# Altium PCB PCB1.PcbDoc
Units mm, origin at the board's own origin, x right, y up, seen from the top; angles counter-clockwise.
Board outline 130 x 70 mm, 2 copper layers (Top Layer, Bottom Layer), stack 2.071 mm thick; 22 components, 15 nets, 74 pads, 1 vias.
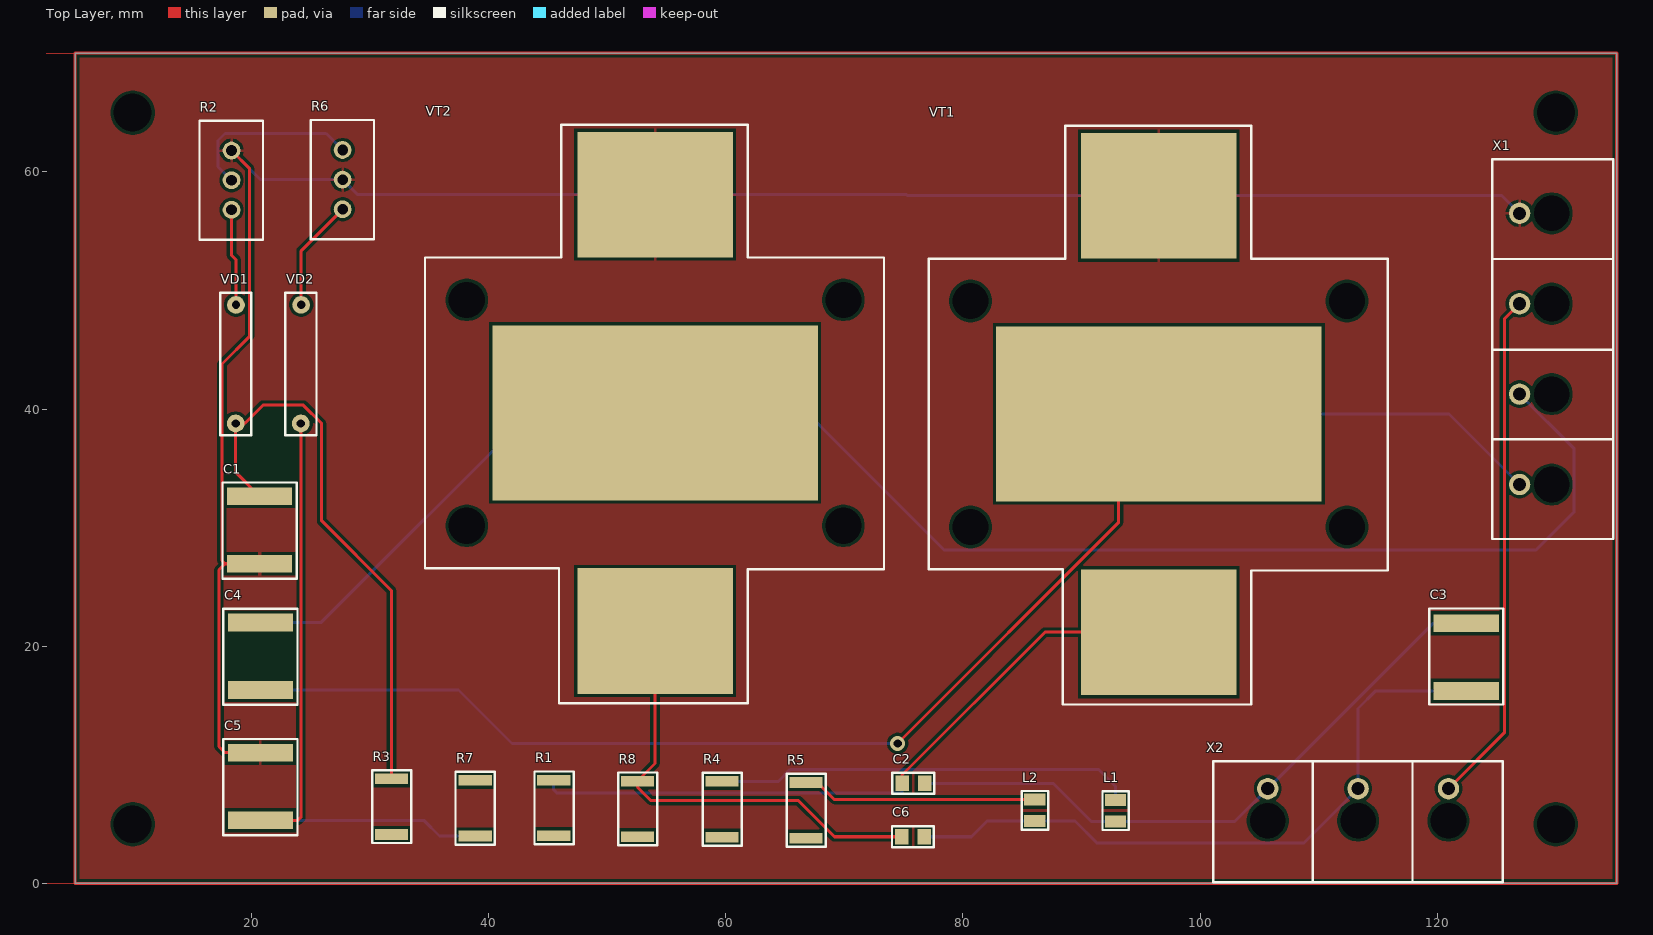
[diagram p0: Top Layer view]
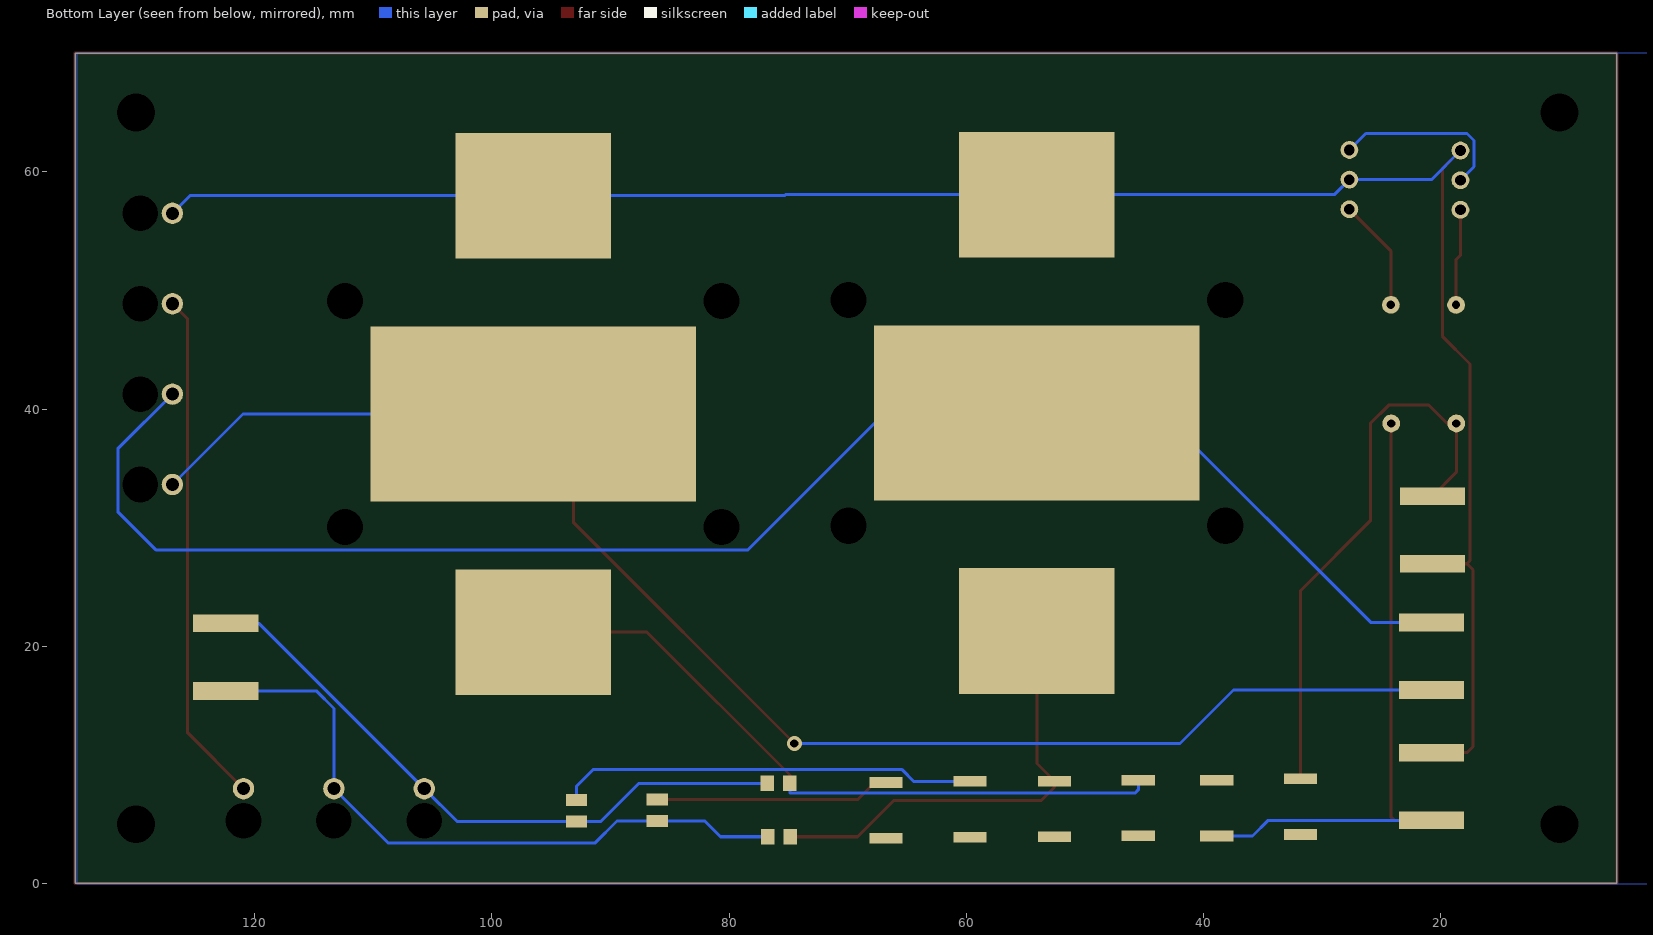
[diagram p1: Bottom Layer view, seen from below]
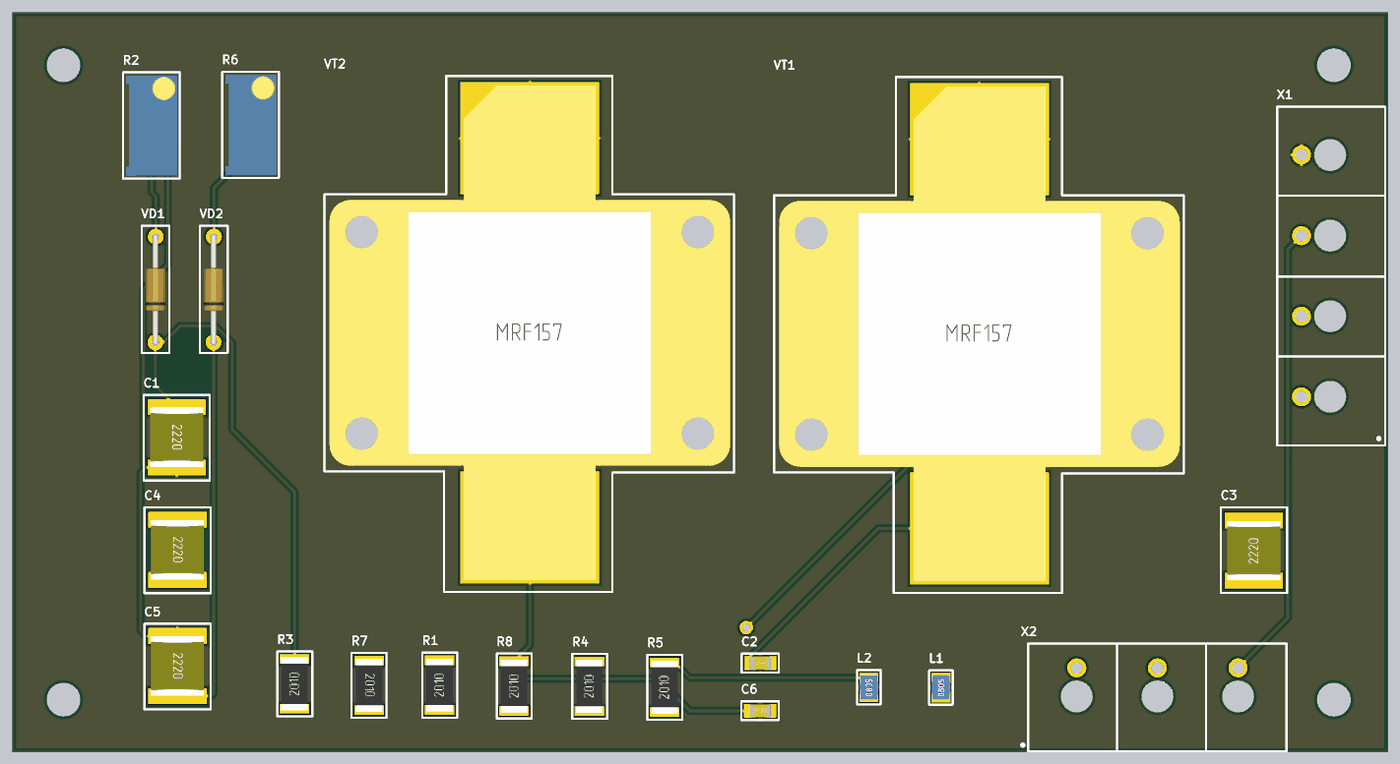
[diagram p2: 3D render of the assembled board from above, using the file's embedded part models]

## Layer stack, top to bottom
Top Solder: solder mask 0.0102, Solder Resist, Dk 3.5
Top Layer: signal copper 0.0356
Dielectric 1: dielectric 2, FR-4, Dk 4.8
Bottom Layer: signal copper 0.0356
Bottom Solder: solder mask 0.0102, Solder Resist, Dk 3.5

## Board outline
5.146,0.021 5.146,70.021 135.146,70.021 135.146,0.021

## Design rules (kind name [scope] priority, off if disabled: settings)
Clearance [All] p1: gap=0.254 ignorepadtopadclearanceinfootprint=FALSE except(0: Arc-Hole Track-Hole SMDPad-Hole THPad-Hole Via-Hole Fill-Hole Poly-Hole Region-Hole Text-Hole)
PolygonConnect [All] p1: connectstyle=Relief reliefconductorwidth=0.254 reliefentries=4 polygonreliefangle="90 Angle" airgapwidth=0.254
RoutingVias [All] p1: holewidth=0.711 width=1.27 viastyle="Through Hole" minholewidth=0.711 minwidth=1.27 maxholewidth=0.711 maxwidth=1.27
SolderMaskExpansion [All] p1: expansion=0.102 istentingtop=FALSE
Width [All] p1: maxlimit=0.254 minlimit=0.254 preferedwidth=0.254
30 further rules are at their usual default settings.

## Components (designator, comment, footprint, x,y, rotation, side; value= is the part's Value field where it differs from the comment)
C1 "0.1 мкФ-10%-2220" CAP_2220 20.698,29.815 r270 top
C2 "2.2пФ±0.25пФ-0805" CAP_0805 75.826,8.451 r180 top
C3 "820 пФ-5%2220" CAP_2220 122.446,19.097 r90 top
C4 "0.01 мкФ-10%-2220" CAP_2220 20.767,19.173 r270 top
C5 "0.1 мкФ-10%-2220" CAP_2220 20.767,8.183 r270 top
C6 "2.2пФ±0.25пФ 0805" CAP_0805 75.804,3.946 r180 top
L1 "15 нГн-5%-0805" INDUCTOR_0805 92.871,6.143 r90 top
L2 "15 мкГн-5%-0805" INDUCTOR_0805 86.067,6.176 r90 top
R1 "12 кОм-5%-2010" Resistor_2010 45.508,6.373 r90 top
R2 "1 кОм-10%-3296" TRIMPOT 18.333,59.308 r90 top
R3 "100 Ом-5%-2010" Resistor_2010 31.824,6.489 r90 top
R4 "24 Ом-5%-2010" Resistor_2010 59.682,6.263 r90 top
R5 "24 Ом-5%-2010" Resistor_2010 66.77,6.177 r90 top
R6 "1 кОм-10%-3296" TRIMPOT 27.7,59.356 r90 top
R7 "100 Ом-5% 2010" Resistor_2010 38.891,6.355 r270 top
R8 "12 кОм-5%-2010" Resistor_2010 52.56,6.289 r90 top
VD1 "1N4148" DIODE 18.682,43.795 r270 top
VD2 "1N4148" DIODE 24.176,43.797 r270 top
VT1 "MRF157" MOSFET 96.521,39.597 r0 top
VT2 "MRF157" MOSFET 54.048,39.691 r0 top
X1 "15EDGB-3.81-04P-14-00A(H)" "CON: WJ06-04P" 129.644,48.888 r90 top
X2 "XY130-9.5-3P-14" "CON: WJ06-03P" 113.328,5.3 r0 top

## Footprints (in the part's own frame and the unit in brackets; to place one, negate y for a bottom-side part, rotate by r counter-clockwise, add the part's x,y. Pads: shape width x height; smd on the part's side, far side on the other; paste and mask are expansions set on the pad)
CAP_0805 [mm]
  rect 1.14x1.3 all layers, no hole: 0(-0.95,0) 1(0.95,0)
  silkscreen extent -1.75,-0.9 1.78,0.88, body extent -1,-0.63 1,0.63, height 0.61
CAP_2220 [mm]
  rect 1.5x5.5 all layers, no hole: 0(-2.85,0) 1(2.85,0)
  silkscreen extent -4,-3.13 4.1,3.12, body extent -2.8,-2.5 2.8,2.5, height 1.8
"CON: WJ06-03P" [mm]
  round 1.8 hole 1.1: 1(-7.62,2.7) 2(0,2.7) 3(7.62,2.7)
  round 0.5 on Top Overlay: ""(-12.71,-4.6)
  round 0.5 on Mech1: ""(-11.61,-4.6)
  round 2.4 hole 3: ""(-7.62,0) ""(0,0) ""(7.62,0)
  silkscreen extent -12.21,-5.2 12.2,5, body extent -12.12,-5.08 12.12,4.92, height 6
"CON: WJ06-04P" [mm]
  round 1.8 hole 1.1: 1(-15.24,2.7) 2(-7.62,2.7) 3(0,2.7) 4(7.63,2.7)
  round 0.5 on Mech1: ""(-19.2,-4.6)
  round 0.5 on Top Overlay: ""(-19.2,-4.6)
  round 2.4 hole 3: ""(-15.24,0) ""(-7.62,0) ""(0,0) ""(7.62,0)
  silkscreen extent -19.83,-5.2 12.2,5, body extent -19.74,-5.08 12.12,4.92, height 5.95
DIODE [mm]
  round 1.5 hole 0.7: 0(-5,0.025) 1(5,0)
  silkscreen extent -6.02,-1.3 6,1.33, body extent -5.25,-0.95 5.25,0.95, height 2.94
INDUCTOR_0805 [mm]
  rect 1x1.8 all layers, no hole: 0(-0.9,0) 1(0.9,0)
  silkscreen extent -1.63,-1.13 1.62,1.1, body extent -1.15,-0.89 1.15,0.89, height 1.43
MOSFET [mm]
  round 0 hole 3.05: 0(-15.875,-9.525) 0(-15.875,9.525) 0(15.875,-9.525) 0(15.875,9.525)
  rect 13.1x10.6 all layers, no hole: 1(0,18.4) 2(0,-18.4)
  rect 27.45x14.75 all layers, no hole: 3(0,0)
  silkscreen extent -19.4,-24.5 19.3,24.3, body extent -18.92,-23.38 18.93,23.38, height 8.38
Resistor_2010 [mm]
  rect 0.9x2.8 all layers, no hole: 0(-2.35,0) 1(2.35,0)
  silkscreen extent -3.07,-1.68 3.08,1.62, body extent -2.5,-1.25 2.5,1.25, height 0.55
TRIMPOT [mm]
  round 1.5 hole 0.9: 1(2.5,0) 2(0,0) 3(-2.5,0)
  silkscreen extent -5.02,-2.65 5.03,2.7, body extent -4.76,-2.41 4.76,2.41, height 14.95

## Part data
C1 C4: library part cond_2220C, Manufacturer="Kemet Electronics", PartNumber=C2220C103KGRACAUTO, Href=https://www.chipdip.ru/product0/8005312595, Kind=Capacitor
C2 C6: library part cond_2220C, Manufacturer="Murata Electronics", PartNumber=GRM2165C1H2R2CD01D, Href=https://www.chipdip.ru/product/grm2165c1h2r2c, Kind=Capacitor
C3: library part cond_2220C, Manufacturer="Cornell Dubilier", PartNumber=MC22FF821J-F, Href=https://www.chipdip.ru/product0/8004609482, Kind=Capacitor
C5: library part cond_2220C, Manufacturer=PDC, PartNumber=MA2220XR104K500ERG, Href=https://www.chipdip.ru/product0/8001594404, Kind=Capacitor
L1: library part inductor, Manufactured="Murata Electronics", PartNumber=LQW2BAS15NJ00L, Href=https://www.chipdip.ru/product0/8005346407, Kind=Inductors
L2: library part inductor, Manufactured=Abracon, PartNumber=AIML-0805-150K-T, Href=https://www.chipdip.ru/product0/8005346407, Kind=Inductors
R1 R8: library part Resistor_2010R, Manufacturer=Yageo, PartNumber=RC2010JK-0712KL, Href=https://www.chipdip.ru/product0/8147844003, Kind=Resistor
R2 R6: library part Trimpot, Manufacturer=Bourns, PartNumber=3296X-1-102LF, Href=https://www.chipdip.ru/product0/8038726753, Kind=Trimpot
R3 R7: library part Resistor_2010R, Manufacturer=VIKING, PartNumber=CR-0AJL4--100R, Href=https://www.chipdip.ru/product0/8004209699, Kind=Resistor
R4 R5: library part Resistor_2010R, Manufacturer=VIKING, PartNumber=CR-0AJL4---24R, Href=https://www.chipdip.ru/product0/8014261265, Kind=Resistor
VD1 VD2: Manufacturer="Yangzhou Yangjie Electronic Technology Co., Ltd.", Href=https://www.chipdip.ru/product/1n4148-yj, Kind=Diode, PartNumber=1N4148
VT1 VT2: library part MTF157, Kind=Transistor, PartNumber=MRF157
X1: library part 4-Connector, Manufacturer="Degson Electronics", Href=https://www.chipdip.ru/product/15edgb-3.81-04p-14-00a-h, Kind=Connector, PartNumber=15EDGB-3.81-04P-14-00A(H)
X2: library part 3-Connector, Manufacturer="Ningbo Xinya M&E", ComponentKind=CONNECTOR, HelpURL=https://www.chipdip.ru/product/dg950-03?from=similar_product_auto, PartNum=XY130-9.5-3P-14

## Free pads (board coordinates)
  round 0 hole 3.2 unplated: !*(10,5) !*(10,65) !*(130,5) !*(130,65)

## Via types
v1: diameter 1.27, hole 0.711, Top Layer to Bottom Layer, 1 vias

## Nets (pads, with @x,y where several pads share a name; then routed paths per layer and width w, separated by ;. In a path a pad name is that pad's centre, name@x,y a point inside that pad or via, vN(x,y) a via of type N, cw(c..) or ccw(c..) an arc to the next point about the centre after c; other vN are vias at no path point)
GND: C1.1 C5.0 R2.1 R6.2 VT1.1 VT2.1 X1.4 | length 169.6
  Top Layer w0.254: R2.1 19.863,60.278 19.863,46.152 17.526,43.815 17.526,27.22 17.78,26.966 ; C1.1 17.78,26.966 ; C5.0 17.78,11.033 17.272,11.541 17.272,26.458 17.78,26.966
  Bottom Layer w0.254: R2.1 20.785,59.356 R6.2 28.965,58.091 VT2.1 75.235,58.091 75.329,57.997 VT1.1 125.465,57.997 X1.4
NetC1_0: C1.0 R3.1 VD1.1 | length 47.9
  Top Layer w0.254: C1.0 18.682,34.682 VD1.1 19.44,38.795 20.98,40.335 24.384,40.335 25.933,38.786 25.933,30.582 31.826,24.689 31.826,8.839 R3.1
NetC2_0: C2.0 C3.1 L1.0 X2.1 | length 53.9
  Bottom Layer w0.254: C2.0 87.597,8.451 90.805,5.243 L1.0 102.951,5.243 X2.1 119.655,21.947 C3.1
NetC2_1: C2.1 R1.1 VT1.2 | length 58.5
  Top Layer w0.254: C2.1 74.876,9.144 86.93,21.197 VT1.2
  Bottom Layer w0.254: R1.1 45.491,8.723 45.491,7.899 45.771,7.62 74.876,7.62 C2.1
NetC3_0: C3.0 C6.0 L2.0 X2.2 | length 56.3
  Bottom Layer w0.254: C6.0 80.721,3.945 82.051,5.276 L2.0 89.459,5.276 91.331,3.404 108.732,3.404 X2.2 113.328,14.767 114.808,16.247 C3.0
NetC4_0: C4.0 VT2.3 X1.2 | length 136
  Bottom Layer w0.254: C4.0 25.909,22.023 43.578,39.691 VT2.3 66.862,39.691 78.41,28.143 128.346,28.143 131.547,31.344 131.547,36.665 X1.2
NetC4_1: C4.1 VT1.3 X1.1 | length 127.4
  Top Layer w0.254: v1(74.498,11.811) 93.142,30.455 93.142,39.597 VT1.3
  Bottom Layer w0.254: C4.1 37.474,16.323 41.986,11.811 v1(74.498,11.811) ; VT1.3 120.995,39.597 X1.1
NetC5_1: C5.1 R7.1 VD2.1 | length 55.4
  Top Layer w0.254: C5.1 23.921,5.333 24.176,5.588 VD2.1
  Bottom Layer w0.254: C5.1 34.545,5.333 35.873,4.005 R7.1
NetC6_1: C6.1 R8.1 VT2.2 | length 37.8
  Top Layer w0.254: VT2.2 54.048,10.126 R8.1 52.56,8.128 53.703,6.985 66.133,6.985 69.173,3.945 C6.1
NetL1_1: L1.1 R4.1 | length 35.4
  Bottom Layer w0.254: R4.1 64.442,8.613 65.456,9.627 91.44,9.627 92.888,8.179 92.888,7.043 L1.1
NetL2_1: L2.1 R5.1 | length 19.9
  Top Layer w0.254: R5.1 67.716,8.527 69.167,7.076 L2.1
NetR2_2: R2.2 R6.1 | length 15.1
  Bottom Layer w0.254: R2.2 17.196,60.445 17.196,62.662 17.78,63.246 26.31,63.246 R6.1
NetR2_3: R2.3 VD1.0 | length 8.2
  Top Layer w0.254: R2.3 18.333,52.977 18.707,52.603 VD1.0
NetR6_3: R6.3 VD2.0 | length 9.5
  Top Layer w0.254: VD2.0 24.201,53.358 R6.3
NetX1_3: X1.3 X2.3 | length 43.4
  Top Layer w0.254: X2.3 125.654,12.706 125.654,47.597 X1.3
pads on no net: R1.0 R3.0 R4.0 R5.0 R7.0 R8.0 VT1.0 VT2.0 X1. X2.
copper on no net: | length 400
  Top Layer w0.254: 5.146,0.021 135.146,0.021 135.146,70.021 5.146,70.021 5.146,0.021

## Polygon pours and split planes (outlines as drawn)
GND on Top Layer "GND_L01_P010" (solid, remove dead copper, pour order 10): 5.146,0.021 5.146,70.021 135.146,70.021 135.146,0.021
no net on Top Layer "NONET_L01_P005" (solid, remove dead copper, shelved, pour order 5): 0,0 0,70 135,70 135,0
no net on Bottom Layer "NONET_L02_P006" (solid, remove dead copper, pour order 6): 0,0 0,70 135,70 135,0